# Altium PCB DPRS10A16V.PcbDoc (part 2 of 2)
Units mil, origin at the board's own origin, x right, y up, seen from the top; angles counter-clockwise.
Board outline 1945 x 1815 mil, 4 copper layers (Top Layer, Int1 (GND), Int2 (PWR), Bottom Layer), stack 45.09 mil thick; 68 components, 30 nets, 208 pads, 417 vias.
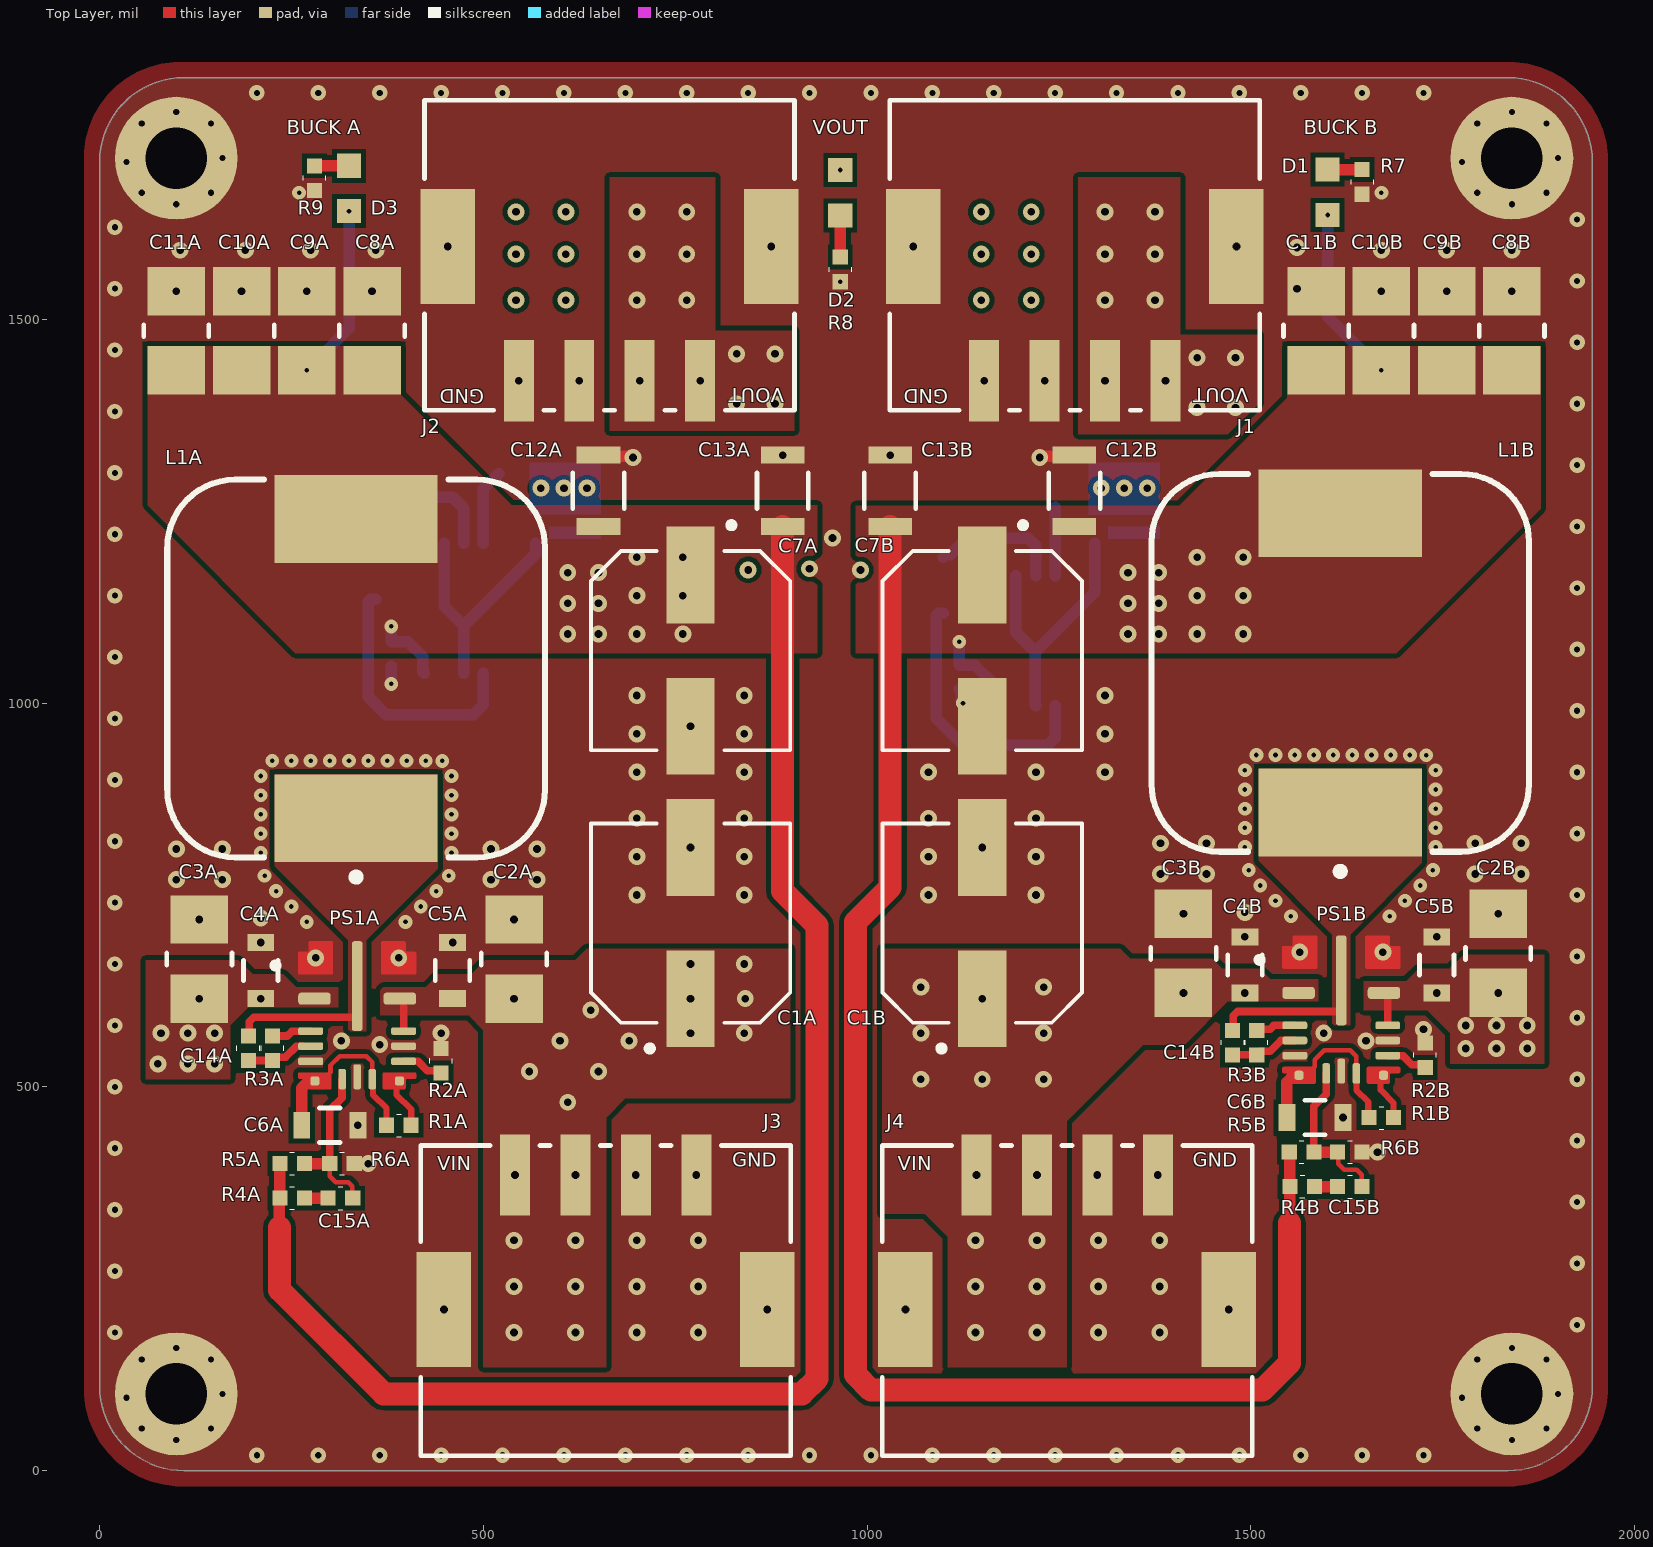
[diagram p0: Top Layer view]

## Part data (continued)
R1A R1B R5A R5B: "62.5mW Thick Film Resistors 50V ±100ppm/℃ ±5% 100kΩ 0402 Chip Resistor - Surface Mount ROHS", Case Code (Imperial)=0402, Manufacturer="Yageo Group", Max Operating Temperature=155°C, Max Power Dissipation=63mW, Min Operating Temperature=-55°C, Power Dissipation=62.5mW, Supplier Part Number=311-100KJRCT-ND, Temperature Coefficient=100ppm/°C, Tolerance=5%, Voltage Rating=50V, Case/Package=0402, Category="Chip SMD Resistors", China RoHS=Non-Compliant, ComponentLink1Description=https://datasheet.octopart.com:443/RC0402JR-07100KL-Yageo-datasheet-175887523.pdf?src-supplier=Newark, ComponentLink1URL=https://datasheet.octopart.com:443/RC0402JR-07100KL-Yageo-datasheet-175887523.pdf?src-supplier=Newark, ComponentLink2Description=https://datasheet.octopart.com:443/RC0402JR-07100KL-Yageo-datasheet-10408619.pdf?src-supplier=Newark, ComponentLink2URL=https://datasheet.octopart.com:443/RC0402JR-07100KL-Yageo-datasheet-10408619.pdf?src-supplier=Newark, ComponentLink3Description=https://datasheet.octopart.com:443/RC0402JR-07100KL-Yageo-datasheet-8324527.pdf?src-supplier=Newark, ComponentLink3URL=https://datasheet.octopart.com:443/RC0402JR-07100KL-Yageo-datasheet-8324527.pdf?src-supplier=Newark, ComponentLink4Description=https://datasheet.octopart.com:443/RC0402JR-07100KL-Yageo-datasheet-141265859.pdf?src-supplier=Upverter, ComponentLink4URL=https://datasheet.octopart.com:443/RC0402JR-07100KL-Yageo-datasheet-141265859.pdf?src-supplier=Upverter, ComponentLink5Description=https://sigma.octopart.com:443/138820526/technical_drawing/Yageo-RC0402JR-07100KL.pdf?src-supplier=Upverter, ComponentLink5URL=https://sigma.octopart.com:443/138820526/technical_drawing/Yageo-RC0402JR-07100KL.pdf?src-supplier=Upverter, ComponentLink6Description=https://datasheet.octopart.com:443/RC0402JR-07100KL-Yageo-datasheet-98239111.pdf?src-supplier=Upverter, ComponentLink6URL=https://datasheet.octopart.com:443/RC0402JR-07100KL-Yageo-datasheet-98239111.pdf?src-supplier=Upverter, ComponentLink7Description=https://datasheet.octopart.com:443/RC0402JR-07100KL-Yageo-datasheet-141435361.pdf?src-supplier=Upverter, ComponentLink7URL=https://datasheet.octopart.com:443/RC0402JR-07100KL-Yageo-datasheet-141435361.pdf?src-supplier=Upverter, ComponentLink8Description=https://datasheet.octopart.com:443/RC0402JR-07100KL-Yageo-datasheet-62067350.pdf?src-supplier=element14+APAC, ComponentLink8URL=https://datasheet.octopart.com:443/RC0402JR-07100KL-Yageo-datasheet-62067350.pdf?src-supplier=element14+APAC, ComponentLink9Description=https://datasheet.octopart.com:443/RC0402JR-07100KL-Yageo-Group-datasheet-176638170.pdf?src-supplier=Farnell, ComponentLink9URL=https://datasheet.octopart.com:443/RC0402JR-07100KL-Yageo-Group-datasheet-176638170.pdf?src-supplier=Farnell, ComponentLink10Description=https://datasheet.octopart.com:443/RC0402JR-07100KL-Yageo-datasheet-164759695.pdf?src-supplier=Future+Electronics, ComponentLink10URL=https://datasheet.octopart.com:443/RC0402JR-07100KL-Yageo-datasheet-164759695.pdf?src-supplier=Future+Electronics, ComponentLink11Description=https://datasheet.octopart.com:443/RC0402JR-07100KL-Yageo-datasheet-137700087.pdf?src-supplier=Future+Electronics, ComponentLink11URL=https://datasheet.octopart.com:443/RC0402JR-07100KL-Yageo-datasheet-137700087.pdf?src-supplier=Future+Electronics, ComponentLink12Description=https://datasheet.octopart.com:443/RC0402JR-07100KL-Yageo-datasheet-12531192.pdf?src-supplier=Future+Electronics, ComponentLink12URL=https://datasheet.octopart.com:443/RC0402JR-07100KL-Yageo-datasheet-12531192.pdf?src-supplier=Future+Electronics, ComponentLink13Description=https://datasheet.octopart.com:443/RC0402JR-07100KL-Yageo-datasheet-505231.pdf?src-supplier=Future+Electronics, ComponentLink13URL=https://datasheet.octopart.com:443/RC0402JR-07100KL-Yageo-datasheet-505231.pdf?src-supplier=Future+Electronics, ComponentLink14Description=https://datasheet.octopart.com:443/RC0402JR-07100KL-Yageo-datasheet-148775077.pdf?src-supplier=TME, ComponentLink14URL=https://datasheet.octopart.com:443/RC0402JR-07100KL-Yageo-datasheet-148775077.pdf?src-supplier=TME, ComponentLink15Description=https://datasheet.octopart.com/RC0402JR-07100KL-Yageo-datasheet-73766026.pdf, ComponentLink15URL=https://datasheet.octopart.com/RC0402JR-07100KL-Yageo-datasheet-73766026.pdf, ComponentLink16Description=https://datasheet.octopart.com:443/RC0402JR-07100KL-Yageo-datasheet-8329306.pdf?src-supplier=element14, ComponentLink16URL=https://datasheet.octopart.com:443/RC0402JR-07100KL-Yageo-datasheet-8329306.pdf?src-supplier=element14, ComponentLink17Description=http://sigma.octopart.com:80/rohs_statement/Yageo-company-2.pdf?src-supplier=Compliance+Statements, ComponentLink17URL=http://sigma.octopart.com:80/rohs_statement/Yageo-company-2.pdf?src-supplier=Compliance+Statements, ComponentLink18Description=http://sigma.octopart.com:80/conflict_mineral_statement/Yageo-company-3.pdf?src-supplier=Compliance+Statements, ComponentLink18URL=http://sigma.octopart.com:80/conflict_mineral_statement/Yageo-company-3.pdf?src-supplier=Compliance+Statements, Composition="Thick Film", Depth=500µm, Features="Moisture Resistant", Height=350µm, Lead Free="Lead Free", Length=1mm, Lifecycle Status=Production, Manufacturer Part Number=RC0402JR-07100KL, Military Standard=Not, Mounting Technology="Surface Mount", Number of Terminals=2, Number of Terminations=2, Packaging="Tape & Reel", Pins=2, Power Rating=63mW, Pricing="1=0.1, 10=0.006, 25=0.0052, 50=0.004, 100=0.0036, 250=0.00284 (USD)", REACH SVHC=Yes, RoHS=Compliant, Schedule B="8533210045, 8533210045|8533210045, 8533210045|8533210045|8533210045, 8533210045|8533210045|8533210045|8533210045", Stock=4354128, Supplier=DigiKey, Termination=SMD/SMT, Voltage Rating (AC)=50V, Voltage Rating (DC)=50V, Width=500µm, Working Voltage=50V
R2A R2B: "Res Thick Film 0402 11.8K Ohm 1% 0.063W(1/16W) 100ppm/C Pad SMD T/R", Case/Package=0402, Manufacturer="Yageo Group", Max Operating Temperature=155°C, Min Operating Temperature=-55°C, Power Dissipation=62.5mW, Supplier Part Number=13-RC0402FR-1311K8LCT-ND, Temperature Coefficient=100ppm/°C, Tolerance=1%, Working Voltage=50V, Category="Chip SMD Resistors", China RoHS=Non-Compliant, ComponentLink1Description=https://datasheet.octopart.com:443/RC0402FR-1311K8L-Yageo-datasheet-175887523.pdf?src-supplier=IHS, ComponentLink1URL=https://datasheet.octopart.com:443/RC0402FR-1311K8L-Yageo-datasheet-175887523.pdf?src-supplier=IHS, ComponentLink2Description=https://datasheet.octopart.com:443/RC0402FR-1311K8L-Yageo-datasheet-164759695.pdf?src-supplier=Future+Electronics, ComponentLink2URL=https://datasheet.octopart.com:443/RC0402FR-1311K8L-Yageo-datasheet-164759695.pdf?src-supplier=Future+Electronics, ComponentLink3Description=https://datasheet.octopart.com:443/RC0402FR-1311K8L-Yageo-datasheet-141265859.pdf?src-supplier=Future+Electronics, ComponentLink3URL=https://datasheet.octopart.com:443/RC0402FR-1311K8L-Yageo-datasheet-141265859.pdf?src-supplier=Future+Electronics, ComponentLink4Description=https://datasheet.octopart.com/RC0402FR-1311K8L-Yageo-datasheet-73766026.pdf, ComponentLink4URL=https://datasheet.octopart.com/RC0402FR-1311K8L-Yageo-datasheet-73766026.pdf, ComponentLink5Description=https://datasheet.octopart.com:443/RC0402FR-1311K8L-Yageo-datasheet-10408619.pdf?src-supplier=_legacy+Avnet, ComponentLink5URL=https://datasheet.octopart.com:443/RC0402FR-1311K8L-Yageo-datasheet-10408619.pdf?src-supplier=_legacy+Avnet, ComponentLink6Description=http://sigma.octopart.com:80/rohs_statement/Yageo-company-2.pdf?src-supplier=Compliance+Statements, ComponentLink6URL=http://sigma.octopart.com:80/rohs_statement/Yageo-company-2.pdf?src-supplier=Compliance+Statements, ComponentLink7Description=http://sigma.octopart.com:80/conflict_mineral_statement/Yageo-company-3.pdf?src-supplier=Compliance+Statements, ComponentLink7URL=http://sigma.octopart.com:80/conflict_mineral_statement/Yageo-company-3.pdf?src-supplier=Compliance+Statements, Composition="Thick Film", Contact Plating=Tin, Height=350µm, Lifecycle Status=Production, Manufacturer Part Number=RC0402FR-1311K8L, Mounting Technology="Surface Mount", Number of Terminals=2, Packaging="Tape & Reel", Pricing="1=0.1, 10=0.02, 25=0.014, 50=0.0112, 100=0.009, 250=0.00688, 500=0.00566, 1000=0.00474, 5000=0.00328 (USD)", REACH SVHC=Yes, RoHS=Compliant, Stock=194853, Supplier=DigiKey, Width=500µm
R3A R3B: "Zero Ohm Resistor, Thick Film, 100 mW, 1 A, Surface Mount, 0402 [1005 Metric]", Case Code (Imperial)=0402, Manufacturer=Panasonic, Max Operating Temperature=155°C, Max Power Dissipation=100mW, Min Operating Temperature=-55°C, Supplier Part Number=P0.0JCT-ND, Tolerance=5%, Voltage Rating=50V, Case/Package=0402, Category="Chip SMD Resistors", China RoHS=Non-Compliant, ComponentLink1Description=https://sigma.octopart.com:443/138766958/technical_drawing/Panasonic-ERJ-2GE0R00X.pdf?src-supplier=Upverter, ComponentLink1URL=https://sigma.octopart.com:443/138766958/technical_drawing/Panasonic-ERJ-2GE0R00X.pdf?src-supplier=Upverter, ComponentLink2Description=https://datasheet.octopart.com:443/ERJ-2GE0R00X-Panasonic-datasheet-61114972.pdf?src-supplier=Future+Electronics, ComponentLink2URL=https://datasheet.octopart.com:443/ERJ-2GE0R00X-Panasonic-datasheet-61114972.pdf?src-supplier=Future+Electronics, ComponentLink3Description=https://datasheet.octopart.com:443/ERJ-2GE0R00X-Panasonic-datasheet-5314550.pdf?src-supplier=Future+Electronics, ComponentLink3URL=https://datasheet.octopart.com:443/ERJ-2GE0R00X-Panasonic-datasheet-5314550.pdf?src-supplier=Future+Electronics, ComponentLink4Description=https://datasheet.octopart.com:443/ERJ-2GE0R00X-Panasonic-datasheet-13266872.pdf?src-supplier=Newark, ComponentLink4URL=https://datasheet.octopart.com:443/ERJ-2GE0R00X-Panasonic-datasheet-13266872.pdf?src-supplier=Newark, ComponentLink5Description=https://datasheet.octopart.com:443/ERJ-2GE0R00X-Panasonic-datasheet-136608608.pdf?src-supplier=Farnell, ComponentLink5URL=https://datasheet.octopart.com:443/ERJ-2GE0R00X-Panasonic-datasheet-136608608.pdf?src-supplier=Farnell, ComponentLink6Description=https://datasheet.octopart.com:443/ERJ-2GE0R00X-Panasonic-datasheet-10554283.pdf?src-supplier=Farnell, ComponentLink6URL=https://datasheet.octopart.com:443/ERJ-2GE0R00X-Panasonic-datasheet-10554283.pdf?src-supplier=Farnell, ComponentLink7Description=https://datasheet.octopart.com:443/ERJ-2GE0R00X-Panasonic-datasheet-5313456.pdf?src-supplier=Farnell, ComponentLink7URL=https://datasheet.octopart.com:443/ERJ-2GE0R00X-Panasonic-datasheet-5313456.pdf?src-supplier=Farnell, ComponentLink8Description=https://datasheet.octopart.com:443/ERJ-2GE0R00X-Panasonic-datasheet-147443676.pdf?src-supplier=Master+Electronics, ComponentLink8URL=https://datasheet.octopart.com:443/ERJ-2GE0R00X-Panasonic-datasheet-147443676.pdf?src-supplier=Master+Electronics, ComponentLink9Description=https://datasheet.octopart.com:443/ERJ2GE0R00X-Panasonic-datasheet-165581512.pdf?src-supplier=TME, ComponentLink9URL=https://datasheet.octopart.com:443/ERJ2GE0R00X-Panasonic-datasheet-165581512.pdf?src-supplier=TME, ComponentLink10Description=https://datasheet.octopart.com:443/ERJ-2GE0R00X-Panasonic-datasheet-11480398.pdf?src-supplier=Arrow+Electronics, ComponentLink10URL=https://datasheet.octopart.com:443/ERJ-2GE0R00X-Panasonic-datasheet-11480398.pdf?src-supplier=Arrow+Electronics, ComponentLink11Description=https://datasheet.octopart.com:443/ERJ-2GE0R00X-Panasonic-datasheet-118655.pdf?src-supplier=DigiKey, ComponentLink11URL=https://datasheet.octopart.com:443/ERJ-2GE0R00X-Panasonic-datasheet-118655.pdf?src-supplier=DigiKey, ComponentLink12Description=https://datasheet.octopart.com:443/ERJ2GE0R00X-Panasonic-datasheet-27908757.pdf?src-supplier=Electro+Sonic, ComponentLink12URL=https://datasheet.octopart.com:443/ERJ2GE0R00X-Panasonic-datasheet-27908757.pdf?src-supplier=Electro+Sonic, ComponentLink13Description=https://datasheet.octopart.com:443/ERJ-2GE0R00X-Panasonic-datasheet-37173568.pdf?src-supplier=Electro+Sonic, ComponentLink13URL=https://datasheet.octopart.com:443/ERJ-2GE0R00X-Panasonic-datasheet-37173568.pdf?src-supplier=Electro+Sonic, Composition="Thick Film", Contact Plating=Tin, Depth=500µm, Features="Automotive AEC-Q200", Height=350µm, Lead Free="Lead Free", Length=1mm, Lifecycle Status=Production, Manufacturer Part Number=ERJ-2GE0R00X, Military Standard=Not, Mounting Technology="Surface Mount", Number of Terminals=2, Number of Terminations=2, Pins=2, Power Dissipation=100mW, Power Rating=100mW, Pricing="1=0.1, 10=0.014, 25=0.0116, 50=0.010, 100=0.0087, 250=0.00732, 500=0.00644, 1000=0.0057, 5000=0.00436 (USD)", Radiation Hardening=No, REACH SVHC=Yes, RoHS=Compliant, Stock=8964543, Supplier=DigiKey, Termination=SMD/SMT, Voltage Rating (DC)=50V, Width=500µm
R4A R4B: "Res Thick Film 0402 4.99K Ohm 1% 0.1W(1/10W) ±100ppm/C Pad SMD Automotive T/R", Case Code (Imperial)=0402, Case Code (Metric)=1005, Manufacturer="KOA Speer", Max Operating Temperature=155°C, Min Operating Temperature=-55°C, Power Dissipation=100mW, Power Rating=63mW, Supplier Part Number=2019-RK73H1ETTP4991FCT-ND, Temperature Coefficient=100ppm/°C, Tolerance=1%, Voltage Rating=50V, Working Voltage=75V, Case/Package=0402, Category="Chip SMD Resistors", China RoHS=Non-Compliant, ComponentLink1Description=https://datasheet.octopart.com:443/RK73H1ETTP4991F-KOA-Speer-datasheet-181956035.pdf?src-supplier=IHS, ComponentLink1URL=https://datasheet.octopart.com:443/RK73H1ETTP4991F-KOA-Speer-datasheet-181956035.pdf?src-supplier=IHS, ComponentLink2Description=https://datasheet.octopart.com:443/RK73H1ETTP4991F-KOA-Speer-datasheet-11590619.pdf?src-supplier=Upverter, ComponentLink2URL=https://datasheet.octopart.com:443/RK73H1ETTP4991F-KOA-Speer-datasheet-11590619.pdf?src-supplier=Upverter, ComponentLink3Description=https://datasheet.octopart.com:443/RK73H1ETTP4991F-KOA-Speer-datasheet-188906116.pdf?src-supplier=TME, ComponentLink3URL=https://datasheet.octopart.com:443/RK73H1ETTP4991F-KOA-Speer-datasheet-188906116.pdf?src-supplier=TME, ComponentLink4Description=https://datasheet.octopart.com:443/RK73H1ETTP4991F-KOA-Speer-datasheet-149653815.pdf?src-supplier=Newark, ComponentLink4URL=https://datasheet.octopart.com:443/RK73H1ETTP4991F-KOA-Speer-datasheet-149653815.pdf?src-supplier=Newark, ComponentLink5Description=https://datasheet.octopart.com:443/RK73H1ETTP4991F-KOA-Speer-datasheet-155997623.pdf?src-supplier=Future+Electronics, ComponentLink5URL=https://datasheet.octopart.com:443/RK73H1ETTP4991F-KOA-Speer-datasheet-155997623.pdf?src-supplier=Future+Electronics, ComponentLink6Description=https://datasheet.octopart.com:443/RK73H1ETTP4991F-KOA-Speer-datasheet-11541643.pdf?src-supplier=Arrow+Electronics, ComponentLink6URL=https://datasheet.octopart.com:443/RK73H1ETTP4991F-KOA-Speer-datasheet-11541643.pdf?src-supplier=Arrow+Electronics, ComponentLink7Description=https://datasheet.octopart.com:443/RK73H1ETTP4991F-KOA-Speer-datasheet-5377299.pdf?src-supplier=Garrett, ComponentLink7URL=https://datasheet.octopart.com:443/RK73H1ETTP4991F-KOA-Speer-datasheet-5377299.pdf?src-supplier=Garrett, ComponentLink8Description=https://datasheet.octopart.com:443/RK73H1ETTP4991F-KOA-Speer-datasheet-148194.pdf?src-supplier=Garrett, ComponentLink8URL=https://datasheet.octopart.com:443/RK73H1ETTP4991F-KOA-Speer-datasheet-148194.pdf?src-supplier=Garrett, ComponentLink9Description=https://datasheet.octopart.com:443/RK73H1ETTP4991F-KOA-Speer-datasheet-109211.pdf?src-supplier=Garrett, ComponentLink9URL=https://datasheet.octopart.com:443/RK73H1ETTP4991F-KOA-Speer-datasheet-109211.pdf?src-supplier=Garrett, ComponentLink10Description=http://sigma.octopart.com:80/rohs_statement/KOA-Speer-company-17.pdf?src-supplier=Compliance+Statements, ComponentLink10URL=http://sigma.octopart.com:80/rohs_statement/KOA-Speer-company-17.pdf?src-supplier=Compliance+Statements, Composition="Thick Film", Depth=500µm, Height=350µm, Lead Free="Lead Free", Length=1mm, Lifecycle Status=Production, Manufacturer Part Number=RK73H1ETTP4991F, Military Standard=Not, Mounting Technology="Surface Mount", Number of Terminals=2, Pricing="1=0.1, 10=0.027, 25=0.0196, 50=0.0158, 100=0.0129, 250=0.01004, 500=0.0084, 1000=0.00713, 5000=0.00544 (USD)", REACH SVHC=Yes, RoHS=Compliant, Schedule B="8533210045, 8533210045|8533210045|8533210045|8533210045|8533210045|8533210045|8533210045|8533210045|8533210045|8533210045|8533210045|8533210045|8533210045|8533210045|8533210045|8533210045|8533210045|8533210045|8533210045|8533210045|8533210045|8533210045|8533210045|85", Stock=158433, Supplier=DigiKey, Termination=SMD/SMT, Voltage Rating (DC)=50V, Width=500µm
R6A R6B: "Res Thick Film 0402 6.65K Ohm 1% 0.1W(1/10W) ±100ppm/C Pad SMD Automotive T/R", Case Code (Imperial)=0402, Case Code (Metric)=1005, Manufacturer="KOA Speer", Max Operating Temperature=155°C, Min Operating Temperature=-55°C, Power Dissipation=100mW, Power Rating=63mW, Supplier Part Number=2019-RK73H1ETTP6651FCT-ND, Temperature Coefficient=100ppm/°C, Tolerance=1%, Voltage Rating=50V, Working Voltage=75V, Case/Package=0402, Category="Chip SMD Resistors", China RoHS=Non-Compliant, ComponentLink1Description=https://datasheet.octopart.com:443/RK73H1ETTP6651F-KOA-Speer-datasheet-181956035.pdf?src-supplier=IHS, ComponentLink1URL=https://datasheet.octopart.com:443/RK73H1ETTP6651F-KOA-Speer-datasheet-181956035.pdf?src-supplier=IHS, ComponentLink2Description=https://datasheet.octopart.com:443/RK73H1ETTP6651F-KOA-Speer-datasheet-11590619.pdf?src-supplier=Upverter, ComponentLink2URL=https://datasheet.octopart.com:443/RK73H1ETTP6651F-KOA-Speer-datasheet-11590619.pdf?src-supplier=Upverter, ComponentLink3Description=https://datasheet.octopart.com:443/RK73H1ETTP6651F-KOA-Speer-datasheet-149653815.pdf?src-supplier=Newark, ComponentLink3URL=https://datasheet.octopart.com:443/RK73H1ETTP6651F-KOA-Speer-datasheet-149653815.pdf?src-supplier=Newark, ComponentLink4Description=https://datasheet.octopart.com:443/RK73H1ETTP6651F-KOA-Speer-datasheet-155997623.pdf?src-supplier=Future+Electronics, ComponentLink4URL=https://datasheet.octopart.com:443/RK73H1ETTP6651F-KOA-Speer-datasheet-155997623.pdf?src-supplier=Future+Electronics, ComponentLink5Description=https://datasheet.octopart.com:443/RK73H1ETTP6651F-KOA-Speer-datasheet-5377299.pdf?src-supplier=Garrett, ComponentLink5URL=https://datasheet.octopart.com:443/RK73H1ETTP6651F-KOA-Speer-datasheet-5377299.pdf?src-supplier=Garrett, ComponentLink6Description=https://datasheet.octopart.com:443/RK73H1ETTP6651F-KOA-Speer-datasheet-148194.pdf?src-supplier=Garrett, ComponentLink6URL=https://datasheet.octopart.com:443/RK73H1ETTP6651F-KOA-Speer-datasheet-148194.pdf?src-supplier=Garrett, ComponentLink7Description=https://datasheet.octopart.com:443/RK73H1ETTP6651F-KOA-Speer-datasheet-109211.pdf?src-supplier=Garrett, ComponentLink7URL=https://datasheet.octopart.com:443/RK73H1ETTP6651F-KOA-Speer-datasheet-109211.pdf?src-supplier=Garrett, ComponentLink8Description=http://sigma.octopart.com:80/rohs_statement/KOA-Speer-company-17.pdf?src-supplier=Compliance+Statements, ComponentLink8URL=http://sigma.octopart.com:80/rohs_statement/KOA-Speer-company-17.pdf?src-supplier=Compliance+Statements, Composition="Thick Film", Depth=500µm, Height=350µm, Lead Free="Lead Free", Length=1mm, Lifecycle Status=Production, Manufacturer Part Number=RK73H1ETTP6651F, Military Standard=Not, Mounting Technology="Surface Mount", Number of Terminals=2, Pricing="1=0.1, 10=0.027, 25=0.0196, 50=0.0158, 100=0.0129, 250=0.01004, 500=0.0084, 1000=0.00713, 5000=0.00544 (USD)", REACH SVHC=Yes, RoHS=Compliant, Schedule B="8533210045, 8533210045|8533210045|8533210045|8533210045|8533210045|8533210045|8533210045|8533210045|8533210045|8533210045|8533210045|8533210045|8533210045|8533210045|8533210045|8533210045|8533210045|8533210045|8533210045|8533210045|8533210045|8533210045|8533210045|85", Stock=51623, Supplier=DigiKey, Termination=SMD/SMT, Voltage Rating (DC)=50V, Width=500µm
R7 R8 R9: library part ERJPA2F1501X, "Res Thick Film 0402 1.5K Ohm 1% 0.2W(1/5W) ±100ppm/C Pad SMD T/R Automotive AEC-Q200", Case Code (Imperial)=0402, Case Code (Metric)=1005, Manufacturer=Panasonic, Max Operating Temperature=155°C, Max Power Dissipation=200mW, Min Operating Temperature=-55°C, Supplier Part Number=P17225DKR-ND, Temperature Coefficient=100ppm/°C, Tolerance=1%, Voltage Rating=50V, Case/Package=0402, Category="Chip SMD Resistors", ComponentLink1Description=https://datasheet.octopart.com:443/ERJPA2F1501X-Panasonic-datasheet-182147306.pdf?src-supplier=IHS, ComponentLink1URL=https://datasheet.octopart.com:443/ERJPA2F1501X-Panasonic-datasheet-182147306.pdf?src-supplier=IHS, ComponentLink2Description=https://datasheet.octopart.com:443/ERJPA2F1501X-Panasonic-datasheet-68299097.pdf?src-supplier=Future+Electronics, ComponentLink2URL=https://datasheet.octopart.com:443/ERJPA2F1501X-Panasonic-datasheet-68299097.pdf?src-supplier=Future+Electronics, ComponentLink3Description=https://datasheet.octopart.com:443/ERJPA2F1501X-Panasonic-datasheet-136608609.pdf?src-supplier=Newark, ComponentLink3URL=https://datasheet.octopart.com:443/ERJPA2F1501X-Panasonic-datasheet-136608609.pdf?src-supplier=Newark, ComponentLink4Description=https://datasheet.octopart.com:443/ERJPA2F1501X-Panasonic-datasheet-62334979.pdf?src-supplier=Newark, ComponentLink4URL=https://datasheet.octopart.com:443/ERJPA2F1501X-Panasonic-datasheet-62334979.pdf?src-supplier=Newark, Composition="Thick Film", Features="Automotive AEC-Q200", Height=350µm, Length=990.6µm, Lifecycle Status=Production, Manufacturer Part Number=ERJPA2F1501X, Mounting Technology="Surface Mount", Number of Terminals=2, Number of Terminations=2, Power Dissipation=200mW, Power Rating=200mW, Pricing="1=0.19, 10=0.094, 25=0.0744, 50=0.063, 100=0.0474, 250=0.0402, 500=0.038, 1000=0.03306, 5000=0.02959 (USD)", REACH SVHC=Yes, RoHS=Compliant, Schedule B="8533210045, 8533210045|8533210045|8533210045|8533210045|8533210045", Stock=65504, Supplier=DigiKey, Voltage Rating (DC)=50V, Width=500µm, Working Voltage=50V
U1 U2: "0.48-V to 42-V, zero IQ automotive ideal diode controller", Package="VSSOP-8 Texas Instruments", Check_prices=https://www.snapeda.com/parts/LM74610QDGKRQ1/Texas+Instruments/view-part/?ref=eda, MF="Texas Instruments", MP=LM74610QDGKRQ1, SnapEDA_Link=https://www.snapeda.com/parts/LM74610QDGKRQ1/Texas+Instruments/view-part/?ref=snap

## Free pads (board coordinates)
  round 160 hole 80: 1(100,100) 2(1840,100) 3(1840,1710) 4(100,1710)

## Via types
v1: diameter 22, hole 10, Top Layer to Bottom Layer, tented both sides, 239 vias
v2: diameter 20, hole 8, Top Layer to Bottom Layer, tented both sides, 110 vias
v3: diameter 18, hole 6, Top Layer to Bottom Layer, tented both sides, 68 vias

## Nets (pads, with @x,y where several pads share a name; then routed paths per layer and width w, separated by ;. In a path a pad name is that pad's centre, name@x,y a point inside that pad or via, vN(x,y) a via of type N, cw(c..) or ccw(c..) an arc to the next point about the centre after c; other vN are vias at no path point)
FBA: C15A.2 PS1A.7 R5A.2 R6A.1 | length 213.8
  Top Layer w6: R6A.1 299.84,383.77 307.77,375.84 324.14,375.84 329.26,370.72 329.26,355.58 C15A.2
  Top Layer w8: R6A.1 R6A.1@300,400.16
  Top Layer w10: R6A.1@300,400.16 300,470 315.94,485.94 PS1A.7
  Top Layer w15: R5A.2@269.84,400 R6A.1
FBB: C15B.2 PS1B.7 R5B.2 R6B.1 | length 208
  Top Layer w6: R6B.1 1614.07,413.93 1614.07,399.67 1621.6,392.15 1637.76,392.15 1644.58,385.33 1644.58,370.42 C15B.2
  Top Layer w10: R5B.2 1582,474.52 1598.08,490.6 PS1B.7
  Top Layer w15: R5B.2 R6B.1
GND: C1A.2 C1B.2 C2A.1 C2B.1 C3A.1 C3B.1 C4A.1 C4B.1 C5A.1 C5B.1 C6A.2 C6B.2 C7A.2 C7B.2 C8A.2 C8B.2 C9A.2 C9B.2 C10A.2 C10B.2 C11A.2 C11B.2 C12A.1 C12B.1 C13A.1 C13B.1 C16.1 C17.2 C19.2 C20.2 C21.2 C23.1 J1.3 J1.4 J1.5 J1.6 J2.3 J2.4 J2.5 J2.6 J3.3 J3.4 J3.5 J3.6 J4.3 J4.4 J4.5 J4.6 pad.1 pad.2 pad.3 pad.4 PS1A.1 PS1A.5 PS1A.8 PS1A.12 PS1A.15 PS1B.1 PS1B.5 PS1B.8 PS1B.12 PS1B.15 R2A.2 R2B.2 R6A.2 R6B.2 R7.2 R8.2 R9.2 | length 153.7
  Top Layer w15: R6A.2 v1(350,400) ; C12A.1 651.66,1321.34 693.66,1321.34 v1(695,1320) ; v1(1225,1320) 1226.34,1321.34 1268.34,1321.34 C12B.1
  Bottom Layer w15: v3(380,1025) C23.1 ; C16.1 1122.34,1015.66 1122.34,1003.47 1125,1000.81 v3(1125,1000)
  other v1: 700,180 780,180 1301.26,180 1381.26,180 448.74,210 870,210 1050,210 1471.26,210 700,240 780,240 1301.26,240 1381.26,240 700,300 780,300 1301.26,300 1381.26,300 698.74,385.2 777.48,385.2 1300,385.2 1378.74,385.2 1665,415 336.5,450 1620,460 365,555 315,560 1650,560 445,570 1595,570 1725,575 281.5,668.15 389.76,668.15 1563.63,675.56 1671.9,675.56 210,688 460,688 1492.13,695.41 1742.13,695.41 130,718 540,718 210,720 1412.13,725.41 1822.13,725.41 1492.13,727.41 700,750 840,750 1080,750 1220,750 100,770 160,770 510,770 570,770 1382.13,777.41 1442.13,777.41 1792.13,777.41 1852.13,777.41 700,800 840,800 1080,800 1220,800 100,810 160,810 510,810 570,810 770,811.85 1150,811.85 1382.13,817.41 1442.13,817.41 1792.13,817.41 1852.13,817.41 700,850 840,850 1080,850 1220,850 700,910 840,910 1080,910 1220,910 1310,910 700,960 840,960 1310,960 770,970 700,1010 840,1010 1310,1010 845,1173.5 991.5,1173.5 925,1175 955,1215 890,1323 1030,1323 546.26,1419.8 625,1419.8 1152.52,1419.8 1231.26,1419.8 100,1536.5 185,1536.5 270,1536.5 355,1536.5 1670,1536.5 1755,1536.5 1840,1536.5 1560,1540 105,1590 190,1590 275,1590 360,1590 1670,1590 1755,1590 1840,1590 1560,1593.5 453.74,1595 875,1595 1060,1595 1481.26,1595
  other v2: 205,20 285,20 365,20 445,20 525,20 605,20 685,20 765,20 845,20 925,20 1005,20 1085,20 1165,20 1245,20 1325,20 1405,20 1485,20 1565,20 1645,20 1725,20 100,40 1840,40 55,55 145,55 1795,55 1885,55 35,95 1775,95 160,100 1900,100 55,145 145,145 1795,145 1885,145 100,160 1840,160 20,180 1925,190 20,260 1925,270 20,340 1925,350 20,420 1925,430 20,500 1925,510 20,580 1925,590 20,660 1925,670 20,740 1925,750 20,820 1925,830 20,900 1925,910 20,980 1925,990 20,1060 1925,1070 20,1140 1925,1150 20,1220 1925,1230 20,1300 1925,1310 20,1380 1925,1390 20,1460 1925,1470 20,1540 1925,1550 20,1620 1925,1630 100,1650 1840,1650 55,1665 145,1665 1795,1665 1885,1665 35,1705 1775,1705 160,1710 1900,1710 55,1755 145,1755 1795,1755 1885,1755 100,1770 1840,1770 205,1795 285,1795 365,1795 445,1795 525,1795 605,1795 685,1795 765,1795 845,1795 925,1795 1005,1795 1085,1795 1165,1795 1245,1795 1325,1795 1405,1795 1485,1795 1565,1795 1645,1795 1725,1795
  other v3: 270,715 398.57,715 1552.13,722.41 1680.7,722.41 250,735 418.57,735 1532.13,742.41 1700.7,742.41 230,755 438.57,755 1512.13,762.41 1720.7,762.41 215,775 455,775 1497.13,782.41 1737.13,782.41 210,805 458.57,805 1492.13,812.41 1740.7,812.41 210,830 458.57,830 1492.13,837.41 1740.7,837.41 210,855 458.57,855 1492.13,862.41 1740.7,862.41 210,880 458.57,880 1492.13,887.41 1740.7,887.41 210,905 458.57,905 1492.13,912.41 1740.7,912.41 225,925 250,925 275,925 300,925 325,925 350,925 375,925 400,925 425,925 446.41,924.65 1507.13,932.41 1532.13,932.41 1557.13,932.41 1582.13,932.41 1607.13,932.41 1632.13,932.41 1657.13,932.41 1682.13,932.41 1707.13,932.41 1728.54,932.06 965,1549 260,1665 1670,1665
NetC14A_1: C14A.1 PS1A.4 R3A.1 | length 77.6
  Top Layer w10: C14A.1 R3A.1 229.66,538.49 242.18,538.49 256.61,552.91 PS1A.4@263.84,552.91
NetC14B_1: C14B.1 PS1B.4 R3B.1 | length 88.8
  Top Layer w10: C14B.1 R3B.1 1512.45,546.55 1524.97,546.55 1538.74,560.32 1557.13,560.32 PS1B.4
NetC15A_1: C15A.1 R4A.2 | length 30
  Top Layer w15: R4A.2@267.84,355 C15A.1
NetC15B_1: C15B.1 R4B.2 | length 30
  Top Layer w15: R4B.2 C15B.1
NetC18_1: C18.1 U1.1 | length 359.3
  Bottom Layer w15: C18.1 1093.5,1117 1090,1113.5 1090,980 1125,945 1235,945 1245,955 U1.1
NetC18_2: C18.2 U1.7 | length 174.3
  Bottom Layer w15: C18.2 1102.5,1193.5 1109,1193.5 1130.5,1215 1210,1215 1219.41,1205.59 U1.7
NetC24_1: C24.1 U2.1 | length 340.8
  Bottom Layer w15: C24.1 353.5,1135.27 350,1131.77 350,1008.27 373.27,985 486.73,985 500,998.27 U2.1
NetC24_2: C24.2 U2.7 | length 208.4
  Bottom Layer w15: C24.2 360,1238.27 390,1268.27 460,1268.27 474.41,1253.86 U2.7
NetD1_C: D1.C R7.1 | length 45
  Top Layer w15: D1.C R7.1
NetD2_C: D2.C R8.1 | length 54.5
  Top Layer w15: R8.1 D2.C
NetD3_C: D3.C R9.1 | length 45
  Top Layer w15: R9.1 D3.C
NetPS1A_3: PS1A.3 R3A.2 | length 52.2
  Top Layer w10: R3A.2 244.54,566.3 250.84,572.6 275,572.6 PS1A.3
NetPS1A_11: PS1A.11 R2A.1 | length 55.2
  Top Layer w10: PS1A.11 414.84,533.31 427.13,521.02 441.98,521.02 R2A.1
NetPS1B_3: PS1B.3 R3B.2 | length 52.2
  Top Layer w10: R3B.2 1508.9,575 1525,575 1530.09,580.09 PS1B.3
NetPS1B_11: PS1B.11 R2B.1 | length 55.2
  Top Layer w10: PS1B.11 1698.18,540.72 1709.86,529.04 1723.51,529.04 R2B.1
NetQ1_4: Q1.4 U1.2 U1.6 | length 353.2
  Bottom Layer w15: U1.6 1193.82,1092.18 1219,1067 ; U1.2 1219,997.12 1219,1067 ; Q1.4 1296.73,1144.73 1219,1067
NetQ2_4: Q2.4 U2.2 U2.6 | length 326.4
  Bottom Layer w15: U2.6 448.82,1126.26 474.41,1100.67 ; U2.2 474.41,1100.67 ; Q2.4 568.23,1194.49 474.41,1100.67
RESETA: PS1A.10 R1A.1 | length 69.1
  Top Layer w8: PS1A.10 386.74,503.71 386.74,489.84 406,470.58 R1A.1@406,454.15
  Top Layer w10: R1A.1 R1A.1@410.15,454.15
RESETB: PS1B.10 R1B.1 | length 63.8
  Top Layer w8: PS1B.10 1668.94,511.18 1668.94,495.96 1686,478.9 R1B.1
SWA: C14A.2 L1A.1 PS1A.16 | length 163
  Top Layer w10: C14A.2 195,567.32 195,585 200.86,590.86 333.74,590.86 PS1A.16@335.63,592.75
SWB: C14B.2 L1B.1 PS1B.16 | length 158.8
  Top Layer w10: C14B.2@1477.13,574.73 1477.13,592.41 1482.99,598.27 PS1B.16@1615.87,598.27
VCCA: C6A.1 PS1A.6 PS1A.9 R1A.2 | length 258.2
  Top Layer w6: 291.63,509.62 300.91,518.9 300.91,528.14 312.77,540 347.72,540 355.31,532.4 PS1A.9
  Top Layer w8: PS1A.6 282.42,509.62 291.63,509.62 ; PS1A.9 356.24,509.24 356.24,489.61 374,471.84 R1A.2
  Top Layer w15: C6A.1@263.15,450.35 263.15,498.26 272.61,507.72 PS1A.6 ; R1A.2 R1A.2@375.53,451.53
VCCB: C6B.1 PS1B.6 PS1B.9 R1B.2 | length 237.5
  Top Layer w6: 1573.76,517.03 1583.05,526.31 1583.05,535.55 1595.37,547.87 1629.39,547.87 1637.45,539.81 PS1B.9
  Top Layer w8: PS1B.9 1637.45,495.92 1652.84,480.53 1652.84,461.16 R1B.2
  Top Layer w15: C6B.1 1547,506.34 1555.79,515.13 PS1B.6
VIN: C1A.1 C1B.1 C2A.2 C2B.2 C3A.2 C3B.2 C4A.2 C4B.2 C5A.2 C5B.2 J3.1 J3.2 J4.1 J4.2 PS1A.2 PS1A.13 PS1A.14 PS1B.2 PS1B.13 PS1B.14 | length 91.1
  Top Layer w10: PS1A.14 393.31,615 396.18,612.13 PS1A.13 ; PS1B.14 1675.44,622.41 1678.31,619.54 PS1B.13
  other v1: 540,180 620,180 1141.26,180 1221.26,180 540,240 620,240 1141.26,240 1221.26,240 540,300 620,300 1141.26,300 1221.26,300 541.26,385.2 620,385.2 1142.52,385.2 1221.26,385.2 610,480 1070,510 1150,510 1230,510 560,520 650,520 76,530 115,530 150,530 1780,550 1820,550 1860,550 600,560 690,560 80,570 115,570 150,570 770,570 840,570 1070,570 1230,570 1780,580 1820,580 1860,580 640,600 130,615 210,615 540,615 770,615 841.24,614.92 1150,615 1412.13,622.41 1492.13,622.41 1742.13,622.41 1822.13,622.41 1070,630 1230,630 770,660 840,660
VOUT_ID: C17.1 C19.1 C20.1 C21.1 D2.A J1.1 J1.2 J2.1 J2.2 Q1.5 Q1.6 Q1.7 Q1.8 Q2.5 Q2.6 Q2.7 Q2.8 U1.8 U2.8 | length 188
  Bottom Layer w15: U2.8 500,1278.98 520,1298.98 ; U1.8 1245,1255
  other v1: 575,1280 605,1280 635,1280 1305,1280 1335,1280 1365,1280 1430,1385 1480,1385 830,1390 880,1390 703.74,1419.8 782.48,1419.8 1310,1419.8 1388.74,1419.8 1430,1450 1480,1450 830,1455 880,1455 542.52,1525 607.52,1525 700,1525 765,1525 1148.78,1525 1213.78,1525 1310,1525 1375,1525 542.52,1585 607.52,1585 700,1585 765,1585 1148.78,1585 1213.78,1585 1310,1585 1375,1585 542.52,1640 607.52,1640 700,1640 765,1640 1148.78,1640 1213.78,1640 1310,1640 1375,1640
  other v3: 965,1694.53
VOUTA: C7A.1 C8A.1 C9A.1 C10A.1 C11A.1 C12A.2 C13A.2 C23.2 D3.A L1A.2 Q2.1 Q2.2 Q2.3 R4A.1 R5A.1 U2.4 | length 2379.5
  Top Layer w15: 234.41,316.51 R4A.1@234.41,354.57 ; R4A.1 R5A.1
  Top Layer w30: 234.41,316.51 234.41,235.59 370,100 915,100 935,120 935,710 890,755 C13A.2
  Bottom Layer w15: v3(270,1433.5) 325,1488.5 v3(325,1640.94) ; v3(380,1100) C23.2 401.69,1080 421.28,1060.41 421.28,1040.92 U2.4
  other v1: 610,1090 650,1090 700,1090 760,1090 610,1130 650,1130 700,1140 760,1140 610,1170 650,1170 700,1190 760,1190
VOUTB: C7B.1 C8B.1 C9B.1 C10B.1 C11B.1 C12B.2 C13B.2 C16.2 D1.A L1B.2 Q1.1 Q1.2 Q1.3 R4B.1 R5B.1 U1.4 | length 2332.1
  Top Layer w15: R5B.1 1550.5,414.5 1550.5,370.5 R4B.1 ; 1550.41,322.78 R4B.1@1550.41,369.41
  Top Layer w30: C13B.2 1030,760 985,715 985,125 1005,105 1515,105 1550.04,140.04 1550.04,322.4
  Bottom Layer w15: v3(1120,1080) C16.2 1120.91,1049.09 1140.59,1049.09 1166.28,1023.41 1166.28,998.66 U1.4 ; v3(1600,1635.94) 1600,1503.5 v3(1670,1433.5)
  other v1: 1340,1090 1380,1090 1430,1090 1490,1090 1340,1130 1380,1130 1430,1140 1490,1140 1340,1170 1380,1170 1430,1190 1490,1190
pads on no net: U1.3 U1.5 U2.3 U2.5

## Polygon pours and split planes (outlines as drawn)
GND on Top Layer "GND_L01_P019" (solid, pour order 19): -20,106.86 ccw(c106.86,106.86) 106.86,-20 1835,-20 ccw(c1835,110) 1965,110 1965,1705 ccw(c1835.01,1705) 1835.01,1834.99 104.99,1834.99 ccw(c104.99,1710) -20,1710
VOUTA on Top Layer "VOUTA_L01_P006" (solid, pour order 6): 62.5,1465 62.5,1257.5 255,1065 935,1065 935,1257.5 537,1257.5 392.5,1402 392.5,1465
SWA on Top Layer "SWA_L01_P016" (solid, pour order 16): 227.98,907.2 227.98,787.13 324.1,691.01 324.1,572.7 347.23,572.7 347.23,691.09 440.58,784.44 440.58,907.2
SWB on Top Layer "SWB_L01_P004" (solid, pour order 4): 1510.12,914.61 1510.12,794.54 1606.24,698.42 1606.24,580.11 1629.37,580.11 1629.37,698.5 1722.72,791.85 1722.72,914.61
VOUT_ID on Top Layer "VOUT_ID_L01_P015" (solid, pour order 15): 1275,1685 1408.24,1685 1408.24,1480 1510,1480 1510,1390 1470,1350 1275,1350
VOUT_ID on Top Layer "VOUT_ID_L01_P014" (solid, pour order 14): 665,1355 665,1685 801.98,1685 801.98,1485 905,1485 905,1355
VIN on Top Layer "VIN_L01_P002" (solid, pour order 2): 1730,600 1760,570 1760,530 1882.13,530 1882.13,672.41 1777.13,672.41 1758.63,653.91 1718.63,653.91 1702.13,637.41 1647.13,637.41 1647.13,600
VIN on Top Layer "VIN_L01_P000" (solid, pour order 0): 1020,680 1020,335 1075,335 1105,305 1105,135 1260,135 1260,455 1360,555 1413.72,555 1470.13,611.41 1588.09,611.41 1588.09,640 1525,640 1511.09,653.91 1462.73,653.91 1449.73,666.95 1343.05,666.95 1330,680
VIN on Top Layer "VIN_L01_P012" (solid, pour order 12): 900,680 900,485 685,485 660,460 660,135 500,135 500,574 481,593 425,593 365.73,593 365.53,630 425,630 441.5,646.5 484.16,646.5 502.44,665 620,665 635,680
VOUTB on Top Layer "VOUTB_L01_P007" (solid, pour order 7): 1689.15,1065 1877.5,1253.35 1877.5,1465 1547.5,1465 1547.5,1397.85 1406.92,1257.28 985,1257.28 985,1065
VIN on Top Layer "VIN_L01_P001" (solid, pour order 1): 170,580 170,510 60,510 60,665 181,665 199.5,646.5 239.5,646.5 256,630 311,630 311,604 194,604
GND on Bottom Layer "GND_L04_P022" (solid, pour order 22): -20,106.86 ccw(c106.86,106.86) 106.86,-20 1835,-20 ccw(c1835,110) 1965,110 1965,1705 ccw(c1835.01,1705) 1835.01,1834.99 104.99,1834.99 ccw(c104.99,1710) -20,1710
VOUT_ID on Bottom Layer "VOUT_ID_L04_P010" (solid, pour order 10): 1377.52,1247.52 1495,1365 1835,1365 1835,1705 110,1705 110,1365 450,1365 567.48,1247.52
VOUTB on Bottom Layer "VOUTB_L04_P017" (solid, pour order 17): 1314.45,1229.75 1314.45,1063.1 1513.5,1063.1 1513.5,1229.75 1381.38,1229.75
VOUTA on Bottom Layer "VOUTA_L04_P008" (solid, pour order 8): 585.47,1230 585.47,1063.35 784.53,1063.35 784.53,1230 652.4,1230
VOUT_ID on Int2 (PWR) (split plane): 1842.41,1789.66 1849.76,1788.69 1856.99,1787.09 1864.07,1784.86 1870.91,1782.02 1877.49,1778.6 1883.74,1774.61 1889.62,1770.1 1895.09,1765.09 1900.1,1759.62 1904.61,1753.74 1908.6,1747.49 1912.02,1740.91 1914.86,1734.07 1917.09,1726.99 1918.69,1719.76 1919.66,1712.41 1919.96,1705.47 1919.92,1705 1919.92,1435.1 1550,1435.1 1546.08,1434.71 1542.31,1433.57 1538.83,1431.71 1535.79,1429.21 1421.68,1315.1 513.32,1315.1 399.21,1429.21 396.17,1431.71 392.69,1433.57 388.92,1434.71 385,1435.1 25.08,1435.1 25.08,1705 25.04,1705.48 25.34,1712.41 26.31,1719.76 27.91,1726.99 30.14,1734.07 32.98,1740.91 36.4,1747.49 40.39,1753.74 44.9,1759.62 49.91,1765.09 55.38,1770.1 61.26,1774.61 67.51,1778.6 74.09,1782.02 80.93,1784.86 88.01,1787.09 95.24,1788.69 102.59,1789.66 109.53,1789.96 110,1789.92 1835,1789.92 1835.47,1789.96
VIN on Int2 (PWR) (split plane): 1535.79,645.79 1538.83,643.29 1542.31,641.43 1546.08,640.29 1550,639.9 1919.92,639.9 1919.92,110 1919.96,109.53 1919.66,102.59 1918.69,95.24 1917.09,88.01 1914.86,80.93 1912.02,74.09 1908.6,67.51 1904.61,61.26 1900.1,55.38 1895.09,49.91 1889.62,44.9 1883.74,40.39 1877.49,36.4 1870.91,32.98 1864.07,30.14 1856.99,27.91 1849.76,26.31 1842.41,25.34 1835.47,25.04 1835,25.08 110,25.08 109.52,25.04 102.59,25.34 95.24,26.31 88.01,27.91 80.93,30.14 74.09,32.98 67.51,36.4 61.26,40.39 55.38,44.9 49.91,49.91 44.9,55.38 40.39,61.26 36.4,67.51 32.98,74.09 30.14,80.93 27.91,88.01 26.31,95.24 25.34,102.59 25.04,109.52 25.08,110 25.08,639.9 385,639.9 388.92,640.29 392.69,641.43 396.17,643.29 399.21,645.79 573.32,819.9 1361.68,819.9
GND on Int2 (PWR) (split plane): 1919.92,680.1 1558.32,680.1 1384.21,854.21 1381.17,856.71 1377.69,858.57 1373.92,859.71 1370,860.1 565,860.1 561.08,859.71 557.31,858.57 553.83,856.71 550.79,854.21 376.68,680.1 25.08,680.1 25.08,1394.9 376.68,1394.9 490.79,1280.79 493.83,1278.29 497.31,1276.43 501.08,1275.29 505,1274.9 1430,1274.9 1433.92,1275.29 1437.69,1276.43 1441.17,1278.29 1444.21,1280.79 1558.32,1394.9 1919.92,1394.9
GND on Int1 (GND) (split plane): 1842.41,1789.66 1849.76,1788.69 1856.99,1787.09 1864.07,1784.86 1870.91,1782.02 1877.49,1778.6 1883.74,1774.61 1889.62,1770.1 1895.09,1765.09 1900.1,1759.62 1904.61,1753.74 1908.6,1747.49 1912.02,1740.91 1914.86,1734.07 1917.09,1726.99 1918.69,1719.76 1919.66,1712.41 1919.96,1705.47 1919.92,1705 1919.92,110 1919.96,109.53 1919.66,102.59 1918.69,95.24 1917.09,88.01 1914.86,80.93 1912.02,74.09 1908.6,67.51 1904.61,61.26 1900.1,55.38 1895.09,49.91 1889.62,44.9 1883.74,40.39 1877.49,36.4 1870.91,32.98 1864.07,30.14 1856.99,27.91 1849.76,26.31 1842.41,25.34 1835.47,25.04 1835,25.08 110,25.08 109.52,25.04 102.59,25.34 95.24,26.31 88.01,27.91 80.93,30.14 74.09,32.98 67.51,36.4 61.26,40.39 55.38,44.9 49.91,49.91 44.9,55.38 40.39,61.26 36.4,67.51 32.98,74.09 30.14,80.93 27.91,88.01 26.31,95.24 25.34,102.59 25.04,109.52 25.08,110 25.08,1705 25.04,1705.48 25.34,1712.41 26.31,1719.76 27.91,1726.99 30.14,1734.07 32.98,1740.91 36.4,1747.49 40.39,1753.74 44.9,1759.62 49.91,1765.09 55.38,1770.1 61.26,1774.61 67.51,1778.6 74.09,1782.02 80.93,1784.86 88.01,1787.09 95.24,1788.69 102.59,1789.66 109.53,1789.96 110,1789.92 1835,1789.92 1835.47,1789.96

## Other copper
Int2 (PWR) (plane layer: these items are gaps in the copper):
  lines w40: 11,660 385,660 565,840 1370,840 1550,660 1934,660 ; 11,1415 385,1415 505,1295 1430,1295 1550,1415 1934,1415

## Silkscreen, mask and mechanical layers (free items; w line width, h text height)
Top Overlay:
  text "BUCK A" at 244,1734.38 h32
  text "VOUT" at 929,1734.38 h32
  text "BUCK B" at 1569,1734.38 h32
  text "VOUT" at 892,1416.62 h32 r180
  text "VOUT" at 1497,1416.62 h32 r180
  text "GND" at 501,1415.62 h32 r180
  text "GND" at 1106,1415.62 h32 r180
  text "GND" at 824,389.38 h32
  text "GND" at 1424,389.38 h32
  text "VIN" at 440,385 h32
  text "VIN" at 1040,385 h32
Bottom Overlay:
  text "DPRS-Nvidia Carrier Board | Rev 1.0 | 2025-10" at 1290,1475 h32
  text "Vin max: 36V | Out: 16V/10A" at 1290,1440 h32
Top Solder:
  lines w60: 0,114.5 ccw(c119.5,114.5) 35,30 ; 0,114.5 ccw(c119.5,114.5) 35,30 ; 0,114.5 0,1710 0,114.5 ; 24.75,1774.75 ccw(c84.5,1715) 0,1715 cw(c84.5,1715) 24.75,1774.75 ; 24.75,1774.75 29.64,1779.64 ; 24.75,1774.75 29.64,1779.64 ; 29.64,1779.64 cw(c115,1694.29) 115,1815 ; 29.64,1779.64 cw(c115,1694.29) 115,1815 ; 35,30 ccw(c107.43,102.43) 107.43,0 ; 35,30 ccw(c107.43,102.43) 107.43,0 ; 107.43,0 1837.57,0 ; 107.43,0 1837.57,0 ; 115,1815 1840,1815 ; 115,1815 1840,1815 ; 1837.57,0 ccw(c1837.57,102.43) 1910,30 ; 1837.57,0 ccw(c1837.57,102.43) 1910,30 ; 1840,1815 cw(c1840,1718.43) 1908.28,1786.72 ; 1840,1815 cw(c1840,1718.43) 1908.28,1786.72 ; 1908.28,1786.72 1916.72,1778.28 ; 1908.28,1786.72 1916.72,1778.28 ; 1910,30 ccw(c1825.5,114.5) 1945,114.5 ; 1910,30 ccw(c1825.5,114.5) 1945,114.5 ; 1916.72,1778.28 cw(c1848.43,1710) 1945,1710 ccw(c1848.43,1710) 1916.72,1778.28 ; 1945,114.5 1944.66,1705.07 1945,114.5
Bottom Solder:
  lines w60: 0,115 ccw(c120.71,115) 35.36,29.64 40.25,24.75 ccw(c100,84.5) 100,0 1840,0 ccw(c1840,96.57) 1908.28,28.28 1920,40 ccw(c1859.64,100.36) 1945,100.36 1945,1710 ccw(c1848.43,1710) 1916.72,1778.28 1905,1790 ccw(c1844.64,1729.64) 1844.64,1815 115,1815 ccw(c115,1694.29) 29.64,1779.64 25,1775 ccw(c85.36,1714.64) 0,1714.64 0,1710 0,115
Mechanical 13:
  the board outline again, w10